# Altium PCB Car-PCB1.PcbDoc (part 3 of 4)
Units mil, origin at the board's own origin, x right, y up, seen from the top; angles counter-clockwise.
Board outline 2206 x 4474.17 mil, 4 copper layers (L1_Top, L2_GND, L3_PWR, L4_BOT), stack 60.912 mil thick; 163 components, 139 nets, 610 pads, 297 vias.
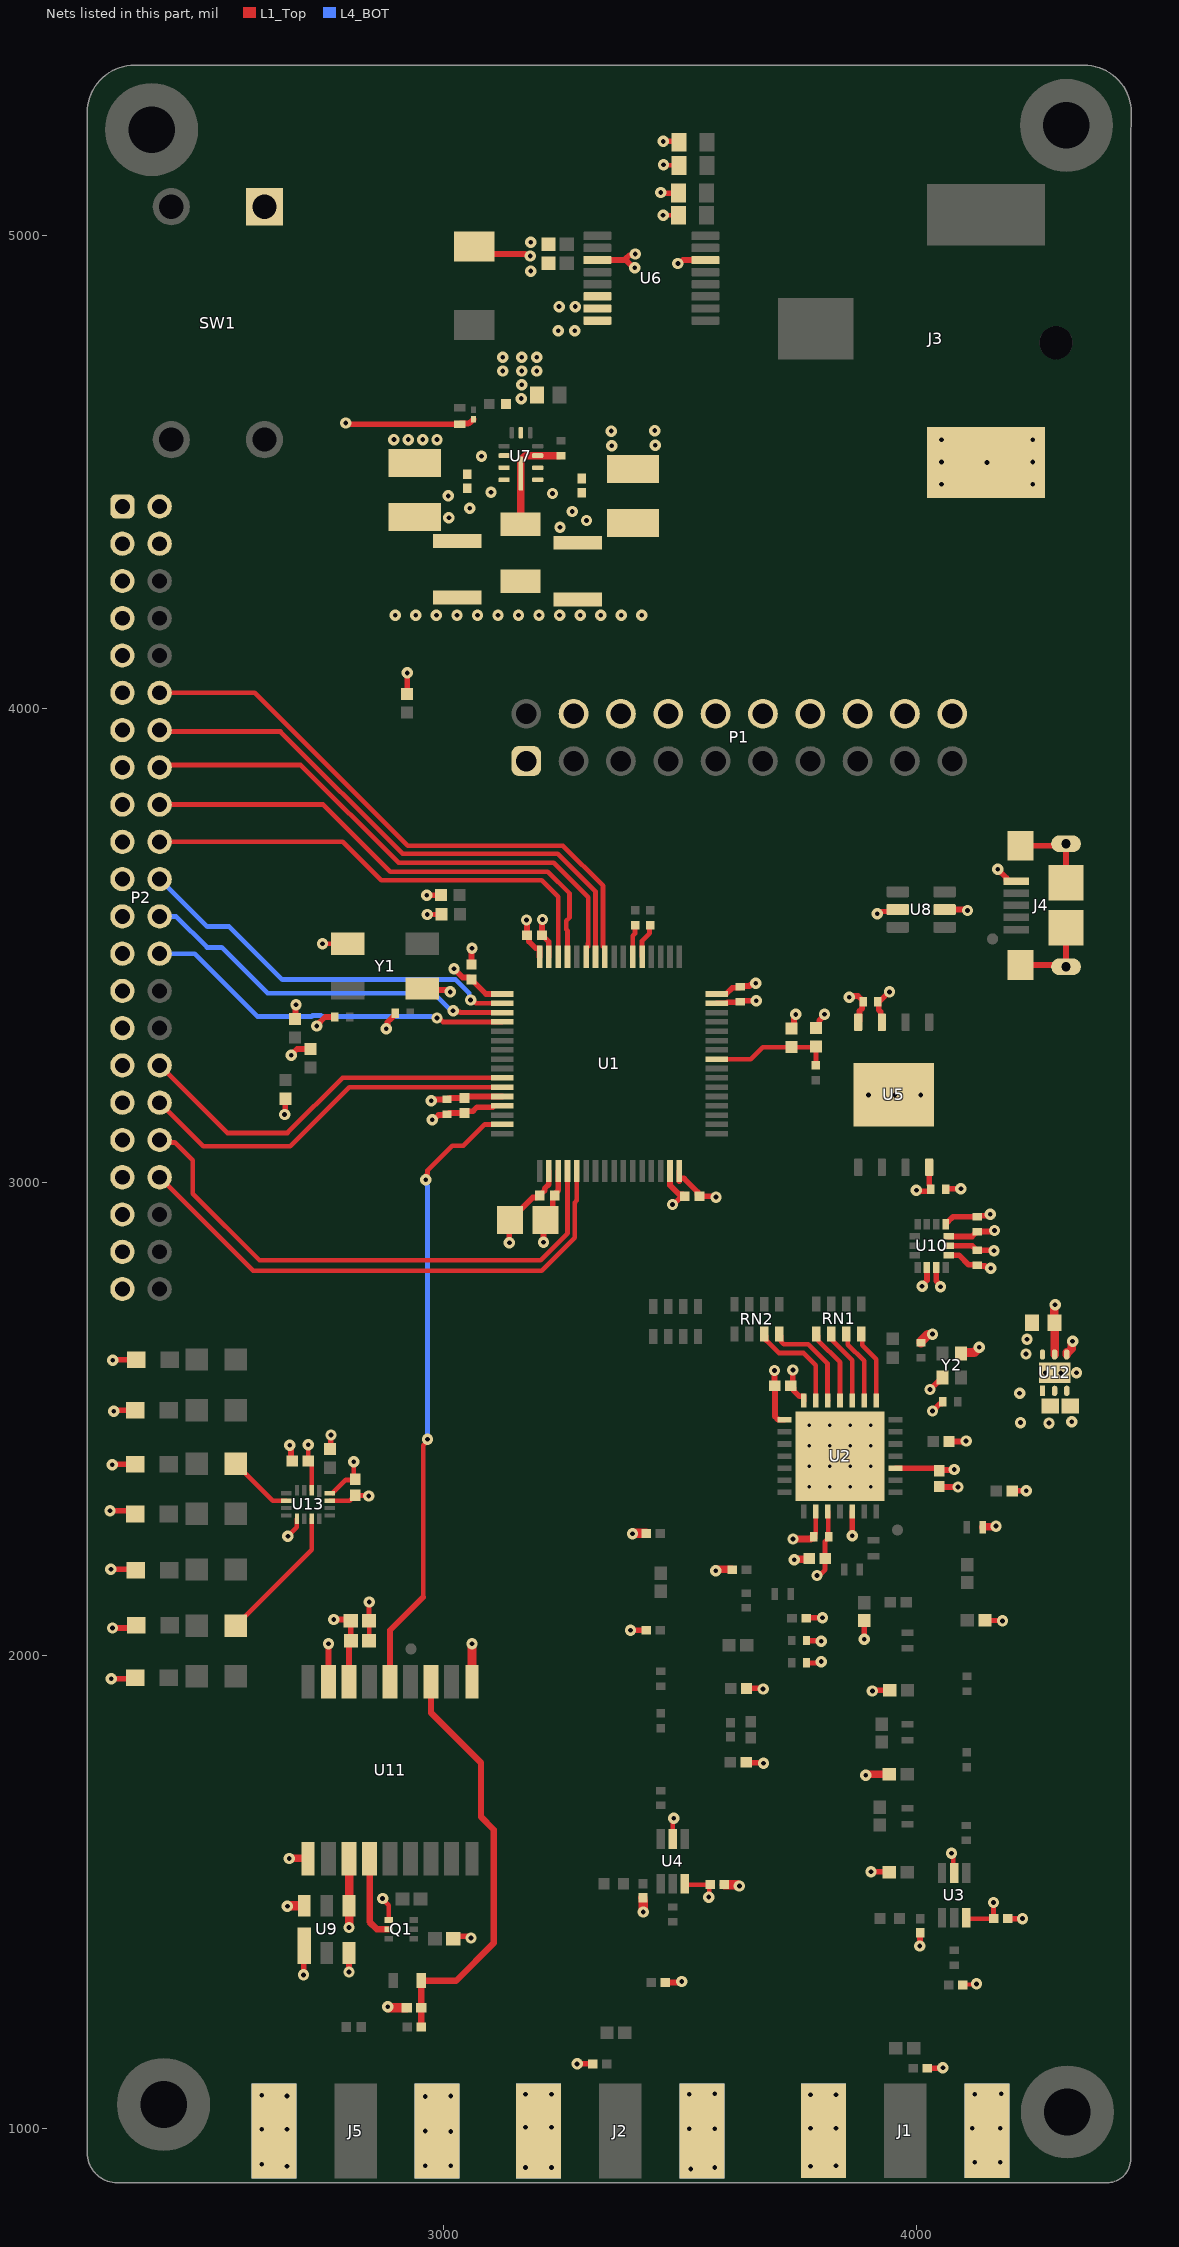
[diagram p4: the nets of this part, all layers, seen from the top]

## Via types
v1: diameter 24, hole 10, L1_Top to L4_BOT, 281 vias
v2: diameter 19.68, hole 7.87, L1_Top to L4_BOT, 16 vias

## Nets (pads, with @x,y where several pads share a name; then routed paths per layer and width w, separated by ;. In a path a pad name is that pad's centre, name@x,y a point inside that pad or via, vN(x,y) a via of type N, cw(c..) or ccw(c..) an arc to the next point about the centre after c; other vN are vias at no path point) (continued)
GND: (continued)
  L1_Top w19.68: v1(2671,1470) 2672.17,1470 2673.31,1471.15 2706.58,1471.15 U9.6@2706.69,1471.26 ; v1(2705,1325) v1@2705.31,1325.31 ; U9.1@2705.31,1385.37 U9.1@2706.69,1386.76 ; U9.1@2706.69,1403.32 U9.1@2710.85,1407.48 ; C53.2@2843.29,2073 cw(c2843.29,2071.43) C53.2@2844.87,2071.43 ; v1@2881.89,1257.87 v1(2882.96,1257.87) 2884.92,1255.91 C56.1@2923.23,1255.91 ; U11.1@3061.02,1944.88 v1(3061,2025) ; v1(3400,2257) 3401.17,2257 3402.04,2257.87 C61.2@3428.99,2257.87 ; C41.1@3422,1488.1 3422.3,1487.79 3422.3,1481.5 3422.59,1481.22 3422.59,1458.14 v1(3422.72,1458) ; C34.2@3593.78,1515.75 3622.08,1515.75 3624.83,1513 v1(3626,1513) ; C42.2@4009.68,2660.92 4009.68,2663.34 4024.52,2678.17 4033.17,2678.17 v1(4034,2679) ; Y2.4@4094.33,2638.28 4096.33,2640.28 4122.28,2640.28 v1(4133,2651)
  other v1: 3523,915 3174,918 3229,918 3574,918 2670,921 3776,921 2962,922 3016,922 3830,922 2617,925 4123,929 4177,929 3016,994 2962,995.08 2617,999 2670,999 3520,1000 3574,1000 3776,1001 3830,1001 4118,1001 4177,1001 3174,1003 3229,1003 2962,1068 2670,1069 3016,1069 2617,1071 3776,1072 3830,1072 3174,1073 3229,1073 3520,1073 4123,1073 3574,1074 4179,1074 4328,2494 4305,2597 4272.31,2597.51 4338.26,2597.51 3899,3184 3954,3184 4009,3184 3247,4384 3303,4398 3012.2,4404 3273,4417 3056,4424 3011,4450 3231,4455 3101,4458 4052.87,4474.43 4245.78,4474.43 4149.32,4520.5 4052.87,4521.68 4245.78,4521.68 4052.87,4568.92 4245.78,4568.92 3165,4655.67 3166,4685 3126,4714 3166,4714 3198,4714 3126,4743 3166,4743 3198,4743 3185,4925 3185,4986
  other v2: 3773.62,2356.3 3816.93,2356.3 3860.24,2356.3 3903.54,2356.3 3773.62,2399.61 3816.93,2399.61 3860.24,2399.61 3903.54,2399.61 3773.62,2442.91 3816.93,2442.91 3860.24,2442.91 3903.54,2442.91 3773.62,2486.22 3816.93,2486.22 3860.24,2486.22 3903.54,2486.22
GPIO_0: P2.12 U1.57 | length 1257.2
  L1_Top w10: P2.12@2401,4034.04 2602.16,4034.04 2925.19,3711 3253.19,3711 3338,3626.19 3338,3497.65 3341.55,3494.09 U1.57@3341.55,3476.38
GPIO_1: P2.14 U1.58 | length 1195
  L1_Top w10: P2.14@2404.77,3952 2656.36,3952 2914.36,3694 3242.36,3694 3321.87,3614.49 U1.58@3321.87,3476.38
GPIO_2: P2.16 U1.59 | length 1149.4
  L1_Top w10: P2.16@2404,3873 2412.39,3881.39 2699.12,3881.39 2905.76,3674.76 3233.76,3674.76 3306.87,3601.65 3306.87,3505.05 3305.96,3504.14 3305.96,3497.87 3302.18,3494.09 U1.59@3302.18,3476.38
GPIO_3: P2.18 U1.61 | length 1081.5
  L1_Top w10: P2.18@2401,3797.82 2746.18,3797.82 2888,3656 3221,3656 3267,3610 3267,3559.11 3260,3552.11 3260,3533.89 3262.81,3531.07 U1.61@3262.81,3476.38
GPIO_4: P2.20 U1.62 | length 1019.1
  L1_Top w10: P2.20@2398.69,3719.08 P2.20@2401,3719.08 2787.92,3719.08 2869,3638 3208,3638 3243.13,3602.87 U1.62@3243.13,3476.38
GPIO_5: P2.22 U1.2 | length 839.7
  L1_Top w10: v1(3058,3385) 3061.79,3385 3068.84,3377.95 U1.2@3125.02,3377.95
  L4_BOT w10: P2.22@2401,3640.34 2501.34,3540 2548.11,3540 2660,3428.11 3026.89,3428.11 3055.32,3399.68 3055.32,3387.68 v1(3058,3385)
GPIO_6: P2.24 U1.3 | length 808.2
  L1_Top w10: v1(3021,3362) 3023.68,3359.32 3035.47,3359.32 3036.52,3358.27 U1.3@3125.02,3358.27
  L4_BOT w10: P2.24@2401,3561.6 2401.33,3561.27 2435.73,3561.27 2501.1,3495.9 2532.4,3495.9 2629,3399.3 2979.91,3399.3 3017.21,3362 v1(3021,3362)
GPIO_7: P2.26 U1.4 | length 785.4
  L1_Top w10: v1(2987,3347) 2990.79,3347 2999.21,3338.58 U1.4@3125.02,3338.58
  L4_BOT w10: P2.26@2401,3482.86 2475.14,3482.86 2608,3350 2721.89,3350 2723.89,3352 2742.11,3352 2744.11,3350 2974.14,3350 2974.46,3349.68 2984.32,3349.68 v1(2987,3347)
GPIO_DAC_OUT1: P2.36 U1.20 | length 1163.4
  L1_Top w10: P2.36@2401,3089.16 2406.28,3083.88 2433.12,3083.88 2471,3046 2471,2976 2612,2835 3206,2835 3262.81,2891.81 U1.20@3262.81,3023.62
GPIO_DAC_OUT2: P2.38 U1.21 | length 1130.2
  L1_Top w10: P2.38@2401,3010.42 2598.32,2813.09 3208.09,2813.09 3278,2883 3278,2957 3282.5,2961.5 U1.21@3282.5,3023.62
GPIO_UART4_RX: R30.2 U1.54 | length 69.1
  L1_Top w10: U1.54@3400.61,3476.38 3400.61,3520.61 3405.25,3525.25 3405.25,3542.5 R30.2@3406,3543.25
GPIO_UART4_TX: R29.2 U1.53 | length 74.2
  L1_Top w10: U1.53@3420.29,3476.38 3420.29,3510.29 3436.16,3526.16 3436.16,3541.41 R29.2@3438,3543.25
GPS_EXTINT: U1.15 U11.5 | length 1314.2
  L1_Top w10: 2958,2123.35 2958,2444.21 2967,2453.21 v1(2967,2457) ; v1(2963.32,3005.32) 2966,3008 2966,3017.09 2967.09,3018.18 2967.09,3025.09 3019,3077 3043,3077 3088.05,3122.05 U1.15@3125.02,3122.05
  L1_Top w11.81: U11.5@2887.8,1944.88 2887.8,2053.15 2958,2123.35
  L4_BOT w10: v1(2963.32,3005.32) 2966,3002.64 2966,2993.46 2967,2992.46 v1(2967,2457)
GPS_LED: D6.2 U13.6 | length 139.3
  L1_Top w10: D6.2@2561.71,2405.25 2639.94,2327.03 U13.6@2668.56,2327.03